# Altium PCB PCB1.PcbDoc
Units mil, origin at the board's own origin, x right, y up, seen from the top; angles counter-clockwise.
Board outline 3780 x 4078 mil, 2 copper layers (Top Layer, Bottom Layer); 63 components, 76 nets, 304 pads, 200 vias.
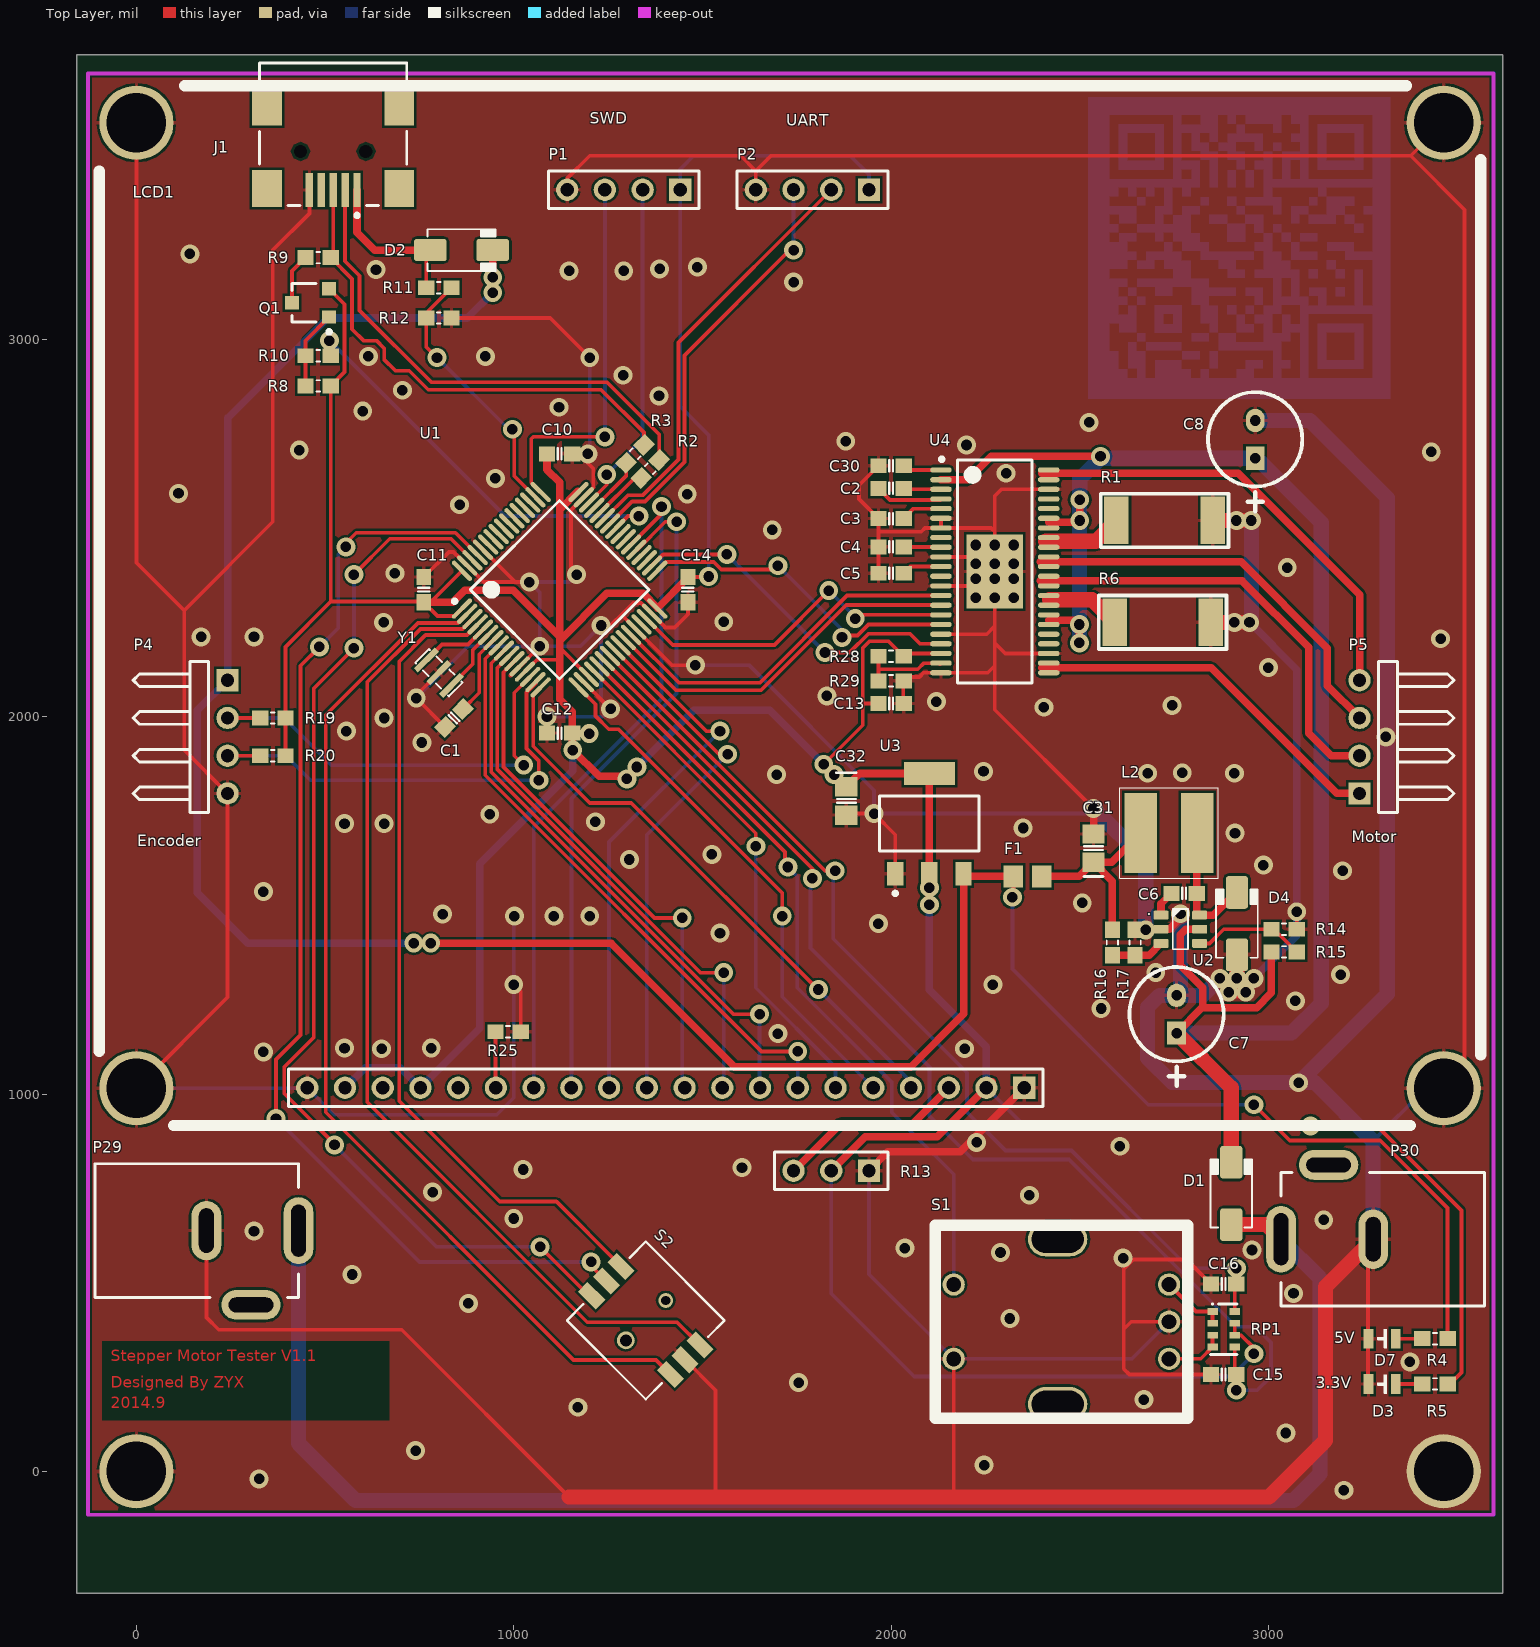
[diagram p0: Top Layer view]
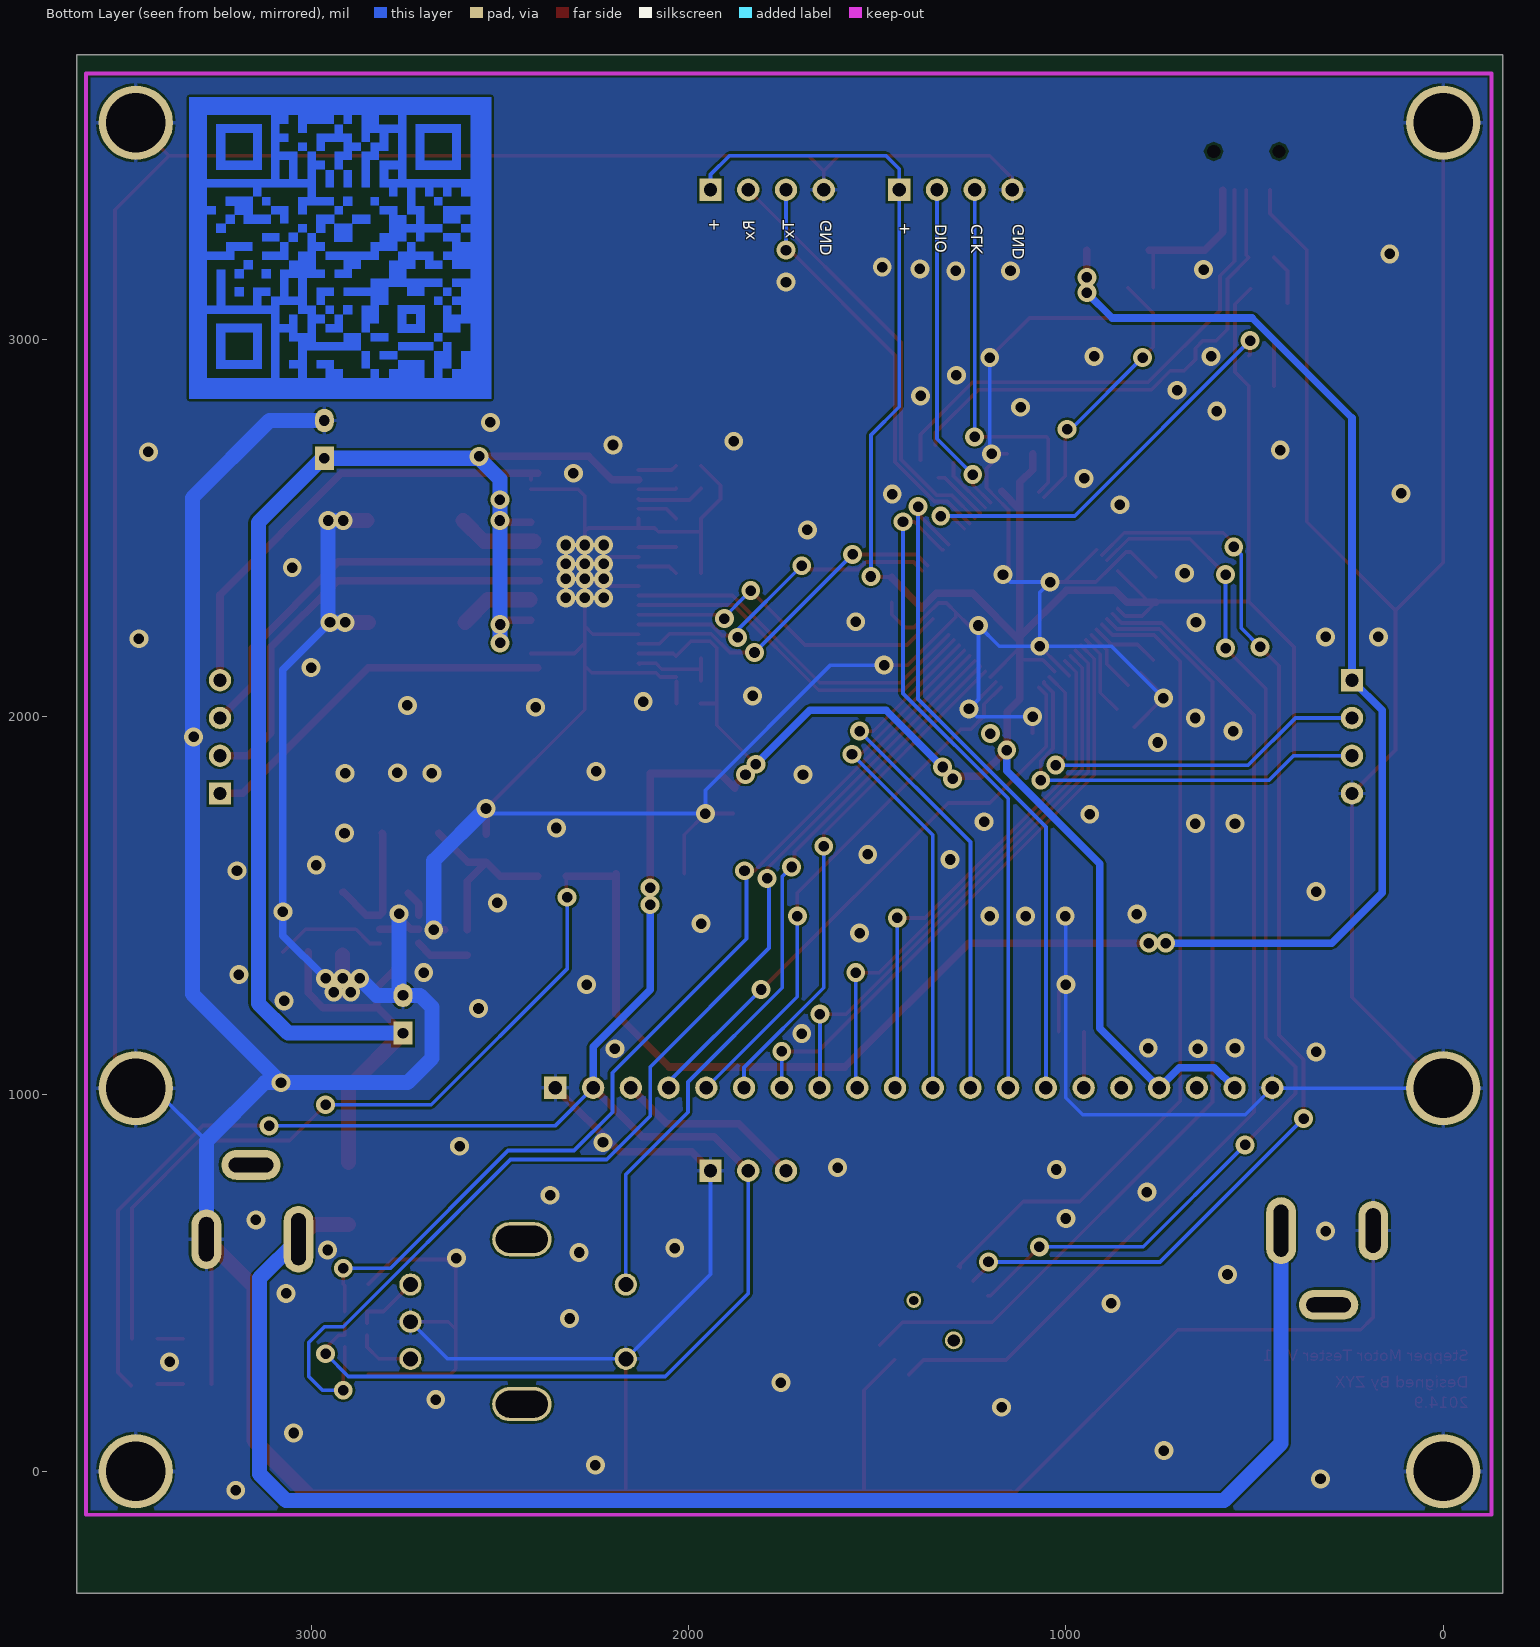
[diagram p1: Bottom Layer view, seen from below]
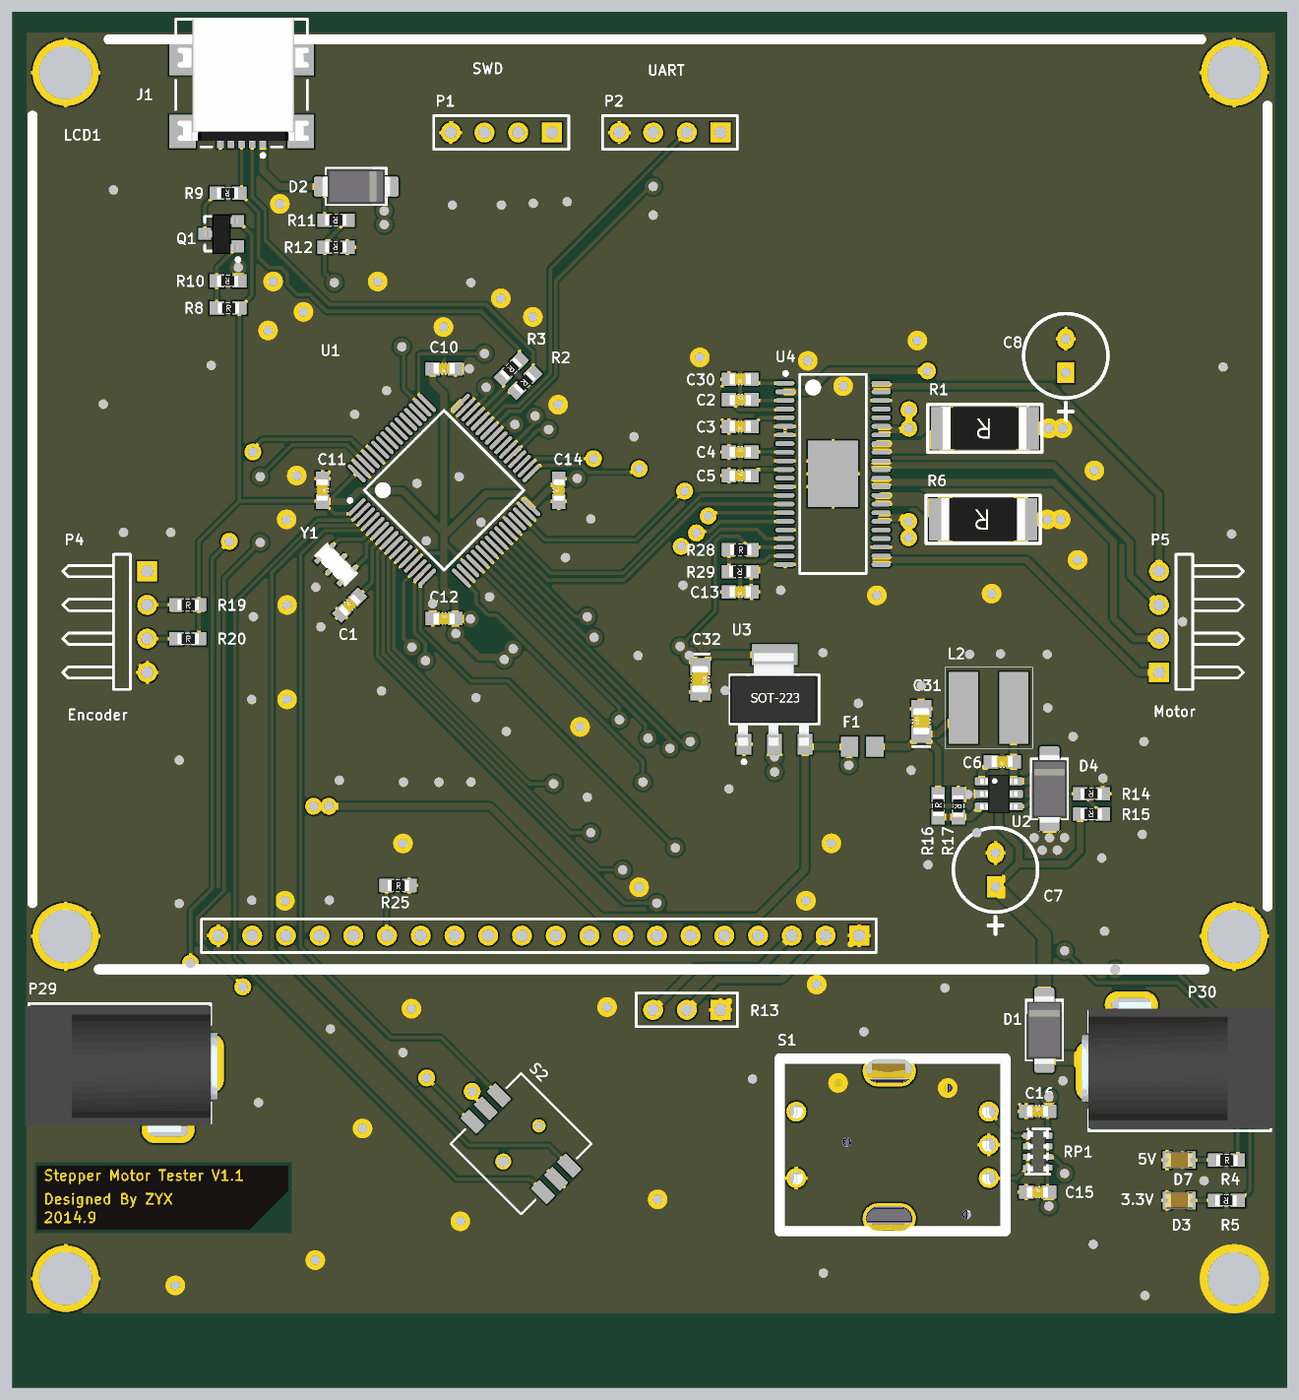
[diagram p2: 3D render of the assembled board from above, using the file's embedded part models]

## Layer stack, top to bottom
Top Layer: signal copper 1.4
Dielectric: dielectric 12.6, FR-4, Dk 4.8
Bottom Layer: signal copper 1.4

## Board outline
-158.43,-323.43 3621.57,-323.43 3621.57,3754.57 -158.43,3754.57

## Design rules (kind name [scope] priority, off if disabled: settings)
Clearance [All] p1: gap=6
ComponentClearance [All] p1 off: gap=0 collisioncheckmode=3 verticalgap=0 showdistances=FALSE
DiffPairsRouting [All] p1: maxlimit=10 minlimit=10 mostfreqgap=10 maxuncoupledlength=500
Height [All] p1 off: minheight=0 maxheight=5000 prefheight=500
HoleSize [All] p1: absolutevalues=TRUE maxlimit=157.48 minlimit=1 maxpercent=80.000 minpercent=20.000
MinimumSolderMaskSliver [All] p1: minsoldermaskwidth=0
PolygonConnect PolygonConnect_1 [IsVia vs IsPolygon] p1: connectstyle=Direct reliefconductorwidth=10 reliefentries=4 polygonreliefangle="90 Angle"
PolygonConnect [All] p2: connectstyle=Relief reliefconductorwidth=10 reliefentries=4 polygonreliefangle="90 Angle"
RoomDefinition Sheet1 [InComponentClass('Sheet1')] p1 off: confinementstyle=ConfineIn formatcopy=TRUE lockcomponents=FALSE outline 3666.57,-258.43 3936.57,-258.43 3936.57,181.57 3666.57,181.57
RoutingVias [All] p1: holewidth=14 width=24 viastyle="Through Hole" minholewidth=28 minwidth=50 maxholewidth=28 maxwidth=50
SilkToSilkClearance [All] p1: silktosilkclearance=0
SilkscreenOverComponentPads [IsPad] p1: minsilkscreentomaskgap=0
SolderMaskExpansion [All] p1: expansion=4
Width Width_VCC [InNet('V5') or InNet('VCC')] p1: maxlimit=30 minlimit=10 preferedwidth=20
Width Width_V24 [InNet('V24')] p2: maxlimit=40 minlimit=20 preferedwidth=30
Width Width_1 [All] p3: maxlimit=40 minlimit=10 preferedwidth=10
21 further rules are at their usual default settings.

## Classes and differential pairs
differential pair USB: +USB_P -USB_N

## Components (designator, comment, footprint, x,y, rotation, side; value= is the part's Value field where it differs from the comment)
C1 "Cap Semi" C-1608[0603] 841.57,1996.57 r45 top
C2 "Cap Semi" C-1608[0603] 2000,2605 r0 top
C3 "Cap Semi" C-1608[0603] 2000,2525 r180 top
C4 "Cap Semi" C-1608[0603] 2000,2450 r0 top
C5 "Cap Semi" C-1608[0603] 2000,2380 r0 top
C6 "Cap Semi" C-1608[0603] 2776.57,1531.57 r180 top
C7 "50V" RB.1/.25 2756.57,1211.57 r180 top
C8 "50V" RB.1/.25 2965,2735 r180 top
C10 "Cap Semi" C-1608[0603] 1121.57,2696.57 r180 top
C11 "Cap Semi" C-1608[0603] 761.57,2336.57 r270 top
C12 "Cap Semi" C-1608[0603] 1121.57,1956.57 r0 top
C13 "Cap Semi" C-1608[0603] 2000,2035 r180 top
C14 "Cap Semi" C-1608[0603] 1461.57,2336.57 r90 top
C15 "Cap Semi" C-1608[0603] 2881.57,256.57 r0 top
C16 "Cap Semi" C-1608[0603] 2881.57,496.57 r0 top
C30 "Cap Semi" C-1608[0603] 2000,2665 r180 top
C31 "6.3V" C-2012[0805] 2536.57,1651.57 r90 top
C32 "6.3V" C-2012[0805] 1881.57,1776.57 r270 top
D1 "1N5822" DO-214AC 2901.57,736.57 r90 top
D2 "1N5822" DO-214AC 861.57,3236.57 r0 top
D3 "3.3V" LED_0805_RED 3301.57,231.57 r180 top
D4 "1N5822" DO-214AC 2916.57,1451.57 r90 top
D7 "5V" LED_0805_RED 3301.57,351.57 r180 top
F1 "" 2012[0805] 2361.57,1576.57 r0 top
J1 "MINI-USB" "Mini USB 3D" 521.57,3704.57 r90 top
L2 "" L-5845 2736.57,1691.57 r180 top
LCD1 "YXY12864T" 12864T -98.43,916.57 r0 top
P1 "SWD" HDR1X4 1441.57,3396.57 r180 top
P2 "DBG_UART" HDR1X4 1941.57,3396.57 r180 top
P4 "Encoder" HDR1X4H 241.57,2096.57 r270 top
P5 "Motor" HDR1X4H 3241.57,1796.57 r90 top
P29 "Power OUT" DC_POWER 181.57,636.57 r0 top
P30 "Power IN" DC_POWER 3281.57,616.57 r180 top
Q1 "8550" SOT23B 461.57,3096.57 r90 top
R1 "Res Semi" R-6332[2512] 2725,2520 r180 top
R2 "Res Semi" R-1608[0603] 1361.57,2656.57 r225 top
R3 "Res Semi" R-1608[0603] 1321.57,2696.57 r225 top
R4 "Res Semi" R-1608[0603] 3441.57,351.57 r0 top
R5 "Res Semi" R-1608[0603] 3441.57,231.57 r180 top
R6 "Res Semi" R-6332[2512] 2720,2250 r180 top
R8 "Res Semi" R-1608[0603] 481.57,2876.57 r0 top
R9 "Res Semi" R-1608[0603] 481.57,3216.57 r180 top
R10 "Res Semi" R-1608[0603] 481.57,2956.57 r180 top
R11 "Res Semi" R-1608[0603] 801.57,3136.57 r180 top
R12 "Res Semi" R-1608[0603] 801.57,3056.57 r180 top
R13 "Adj" HDR1X3 1941.57,796.57 r180 top
R14 "Res Semi" R-1608[0603] 3041.57,1436.57 r180 top
R15 "Res Semi" R-1608[0603] 3041.57,1376.57 r180 top
R16 "Res Semi" R-1608[0603] 2586.57,1401.57 r90 top
R17 "Res Semi" R-1608[0603] 2646.57,1401.57 r270 top
R19 "Res Semi" R-1608[0603] 361.57,1996.57 r0 top
R20 "Res Semi" R-1608[0603] 361.57,1896.57 r0 top
R25 "Res Semi" R-1608[0603] 985,1165 r0 top
R28 "Res Semi" R-1608[0603] 2000,2160 r0 top
R29 "Res Semi" R-1608[0603] 2000,2095 r180 top
RP1 "10K" R0603x4 2881.57,376.57 r270 top
S1 "EC11" EC11 2441.57,396.57 r90 top
S2 "TS-006" TS-006 1350,400 r315 top
U1 "STM32F103RBT6" LQFP64_N 1121.57,2336.57 r45 top
U2 "MP2359" SOT23-6 2766.57,1436.57 r0 top
U3 "REG1117-3.3" SOT223-3D 2101.57,1716.57 r0 top
U4 "LV8731" LV8731_V3 2275,2385 r0 top
Y1 "8M" Crystal_C 801.57,2116.57 r315 top

## Footprints (in the part's own frame and the unit in brackets; to place one, negate y for a bottom-side part, rotate by r counter-clockwise, add the part's x,y. Pads: shape width x height; smd on the part's side, far side on the other; paste and mask are expansions set on the pad)
2012[0805] [mm] "Chip Resistor; Body 2.0 x 1.3 mm (LxW typ)"
  rect 1.3x1.5 smd: 1(-0.95,0) 2(0.95,0)
12864T [mm]
  round 5 hole 4: 0(2.5,2.5) 0(2.5,67.5) 0(90.5,2.5) 0(90.5,67.5)
  rect 1.5x1.5 hole 0.9: 1(62.26,2.54)
  round 1.5 hole 0.9: 2(59.72,2.54) 3(57.18,2.54) 4(54.64,2.54) 5(52.1,2.54) 6(49.56,2.54) 7(47.02,2.54) 8(44.48,2.54) 9(41.94,2.54) 10(39.4,2.54) 11(36.86,2.54) 12(34.32,2.54) 13(31.78,2.54) 14(29.24,2.54) 15(26.7,2.54) 16(24.16,2.54) 17(21.62,2.54) 18(19.08,2.54) 19(16.54,2.54) 20(14,2.54)
  silkscreen extent 0,0 93,70
C-1608[0603] [mm] "Chip Capacitor; Body 1.6 x 0.8 mm (LxW typ)"
  rect 1.1x1 smd: 1(-0.85,0) 2(0.85,0)
  silkscreen extent -0.13,-0.38 0.13,0.38, body extent -1.19,-1.21 1.19,1.17, height 0.29
C-2012[0805] [mm] "Chip Capacitor; Body 2.0 x 1.2 mm (LxW typ)"
  rect 1.3x1.5 smd: 1(-0.95,0) 2(0.95,0)
  silkscreen extent -1.9,-0.65 0.13,0.65, body extent -1,-0.64 1,0.62, height 0.78
Crystal_C [mm] "含电容晶振，村田 3."
  rect 0.4x2 smd: 1(-1.2,0) 2(0,0) 3(1.2,0)
  silkscreen extent -1.6,-0.65 1.6,0.65, body extent -2.25,-2.23 2.25,2.26, height 0.7
DC_POWER [mm]
  oval 2x4.5 hole 1 slot 3.5 at 90 deg: 1(6.3,0.036)
  oval 2x4 hole 1 slot 3 at 90 deg: 2(0.1,0.036)
  oval 4x2 hole 1 slot 3 at 0 deg: 3(3.1,-4.964)
  silkscreen extent -7.4,-4.46 6.3,4.54, body extent -7.66,-5.17 6.84,4.33, height 11
DO-214AC [mm] "JEDEC DO214 variation AC. SMA"
  round 0.508 on Mech15: 0(0,0)
  rrect25% 2.2x1.5 smd: 1(-2.1,0) 2(2.1,0)
  silkscreen extent -2.3,-1.4 2.3,1.4, body extent -2.6,-1.3 2.6,1.3, height 2.42
EC11 [mm]
  oval 2.3x4 hole 1.8 slot 3.5 at 90 deg: 0(-5.55,0) 0(5.55,0)
  round 1.5 hole 1: A(-2.5,-7.5) B(2.5,-7.5) C(0,-7.5) D(-2.5,7) E(2.5,7)
  silkscreen extent -6.5,-8.75 6.5,8.25, body extent -6.59,-7.65 6.51,7.3, height 24.82
HDR1X3 [mm] "Connector; Header; 3 Position"
  rect 1.5x1.5 hole 0.9: 1(0,0)
  round 1.5 hole 0.9: 2(2.54,0) 3(5.08,0)
  silkscreen extent -1.27,-1.27 6.35,1.27
HDR1X4 [mm] "Connector; Header; 4 Position"
  rect 1.5x1.5 hole 0.9: 1(0,0)
  round 1.5 hole 0.9: 2(2.54,0) 3(5.08,0) 4(7.62,0)
  silkscreen extent -1.27,-1.27 8.89,1.27
HDR1X4H [mm] "Connector; Header; 4 Position; Right Angle"
  rect 1.5x1.5 hole 0.9: 1(0,0)
  round 1.5 hole 0.9: 2(2.54,0) 3(5.08,0) 4(7.62,0)
  silkscreen extent -1.27,-6.35 8.89,-1.27
L-5845 [mm]
  rect 2.2x5.4 smd: 1(-1.9,0) 2(1.9,0)
  silkscreen extent -3.3,-3.05 3.3,3.05
LED_0805_RED [mil]
  rect 26x52 smd: 1(-36,0) 2(36,0)
  silkscreen extent -12,-24 12,24, body extent -40,-25 40,25, height 43
LQFP64_N [mm] "Thin QFP, 64-Leads, Body 10x10mm, Pitch 0.5mm, IPC Medium Density"
  oval 1.8x0.3 smd: 1(-5.55,3.75) 2(-5.55,3.25) 3(-5.55,2.75) 4(-5.55,2.25) 5(-5.55,1.75) 6(-5.55,1.25) 7(-5.55,0.75) 8(-5.55,0.25) 9(-5.55,-0.25) 10(-5.55,-0.75) 11(-5.55,-1.25) 12(-5.55,-1.75) 13(-5.55,-2.25) 14(-5.55,-2.75) 15(-5.55,-3.25) 16(-5.55,-3.75) 33(5.55,-3.75) 34(5.55,-3.25) 35(5.55,-2.75) 36(5.55,-2.25) 37(5.55,-1.75) 38(5.55,-1.25) 39(5.55,-0.75) 40(5.55,-0.25) 41(5.55,0.25) 42(5.55,0.75) 43(5.55,1.25) 44(5.55,1.75) 45(5.55,2.25) 46(5.55,2.75) 47(5.55,3.25) 48(5.55,3.75)
  oval 0.3x1.8 smd: 17(-3.75,-5.55) 18(-3.25,-5.55) 19(-2.75,-5.55) 20(-2.25,-5.55) 21(-1.75,-5.55) 22(-1.25,-5.55) 23(-0.75,-5.55) 24(-0.25,-5.55) 25(0.25,-5.55) 26(0.75,-5.55) 27(1.25,-5.55) 28(1.75,-5.55) 29(2.25,-5.55) 30(2.75,-5.55) 31(3.25,-5.55) 32(3.75,-5.55) 49(3.75,5.55) 50(3.25,5.55) 51(2.75,5.55) 52(2.25,5.55) 53(1.75,5.55) 54(1.25,5.55) 55(0.75,5.55) 56(0.25,5.55) 57(-0.25,5.55) 58(-0.75,5.55) 59(-1.25,5.55) 60(-1.75,5.55) 61(-2.25,5.55) 62(-2.75,5.55) 63(-3.25,5.55) 64(-3.75,5.55)
  silkscreen extent -5.67,-4.25 4.25,4.57, body extent -5,-5 5,5, height 1.6
LV8731_V3 [mm] "SOP, 44-Leads, Body 15.0x5.6mm (max), Pitch 0.65mm, IPC Medium Density"
  oval 1.45x0.35 smd: 1(-3.625,6.825) 2(-3.625,6.175) 3(-3.625,5.525) 4(-3.625,4.875) 5(-3.625,4.225) 6(-3.625,3.575) 7(-3.625,2.925) 8(-3.625,2.275) 9(-3.625,1.625) 10(-3.625,0.975) 11(-3.625,0.325) 12(-3.625,-0.325) 13(-3.625,-0.975) 14(-3.625,-1.625) 15(-3.625,-2.275) 16(-3.625,-2.925) 17(-3.625,-3.575) 18(-3.625,-4.225) 19(-3.625,-4.875) 20(-3.625,-5.525) 21(-3.625,-6.175) 22(-3.625,-6.825) 23(3.625,-6.825) 24(3.625,-6.175) 25(3.625,-5.525) 26(3.625,-4.875) 27(3.625,-4.225) 28(3.625,-3.575) 29(3.625,-2.925) 30(3.625,-2.275) 31(3.625,-1.625) 32(3.625,-0.975) 33(3.625,-0.325) 34(3.625,0.325) 35(3.625,0.975) 36(3.625,1.625) 37(3.625,2.275) 38(3.625,2.925) 39(3.625,3.575) 40(3.625,4.225) 41(3.625,4.875) 42(3.625,5.525) 43(3.625,6.175) 44(3.625,6.825)
  rect 3.8x5 smd: 45(0,0)
  silkscreen extent -3.7,-7.5 2.5,7.67, body extent -2.8,-7.5 2.8,7.5, height 1.7
"Mini USB 3D" [mm] "Connector; USB2.0, Type B, SM; 5 Position; Right Angle"
  rect 2.3x0.5 smd: 1(-7.85,-1.6) 2(-7.85,-0.8) 3(-7.85,0) 4(-7.85,0.8) 5(-7.85,1.6)
  rect 2.5x2 smd: 6(-7.75,4.45) 7(-2.25,4.45) 8(-7.75,-4.45) 9(-2.25,-4.45)
  round 0.6 hole 0.9 unplated: MH1(-5.25,2.2) MH2(-5.25,-2.2)
  silkscreen extent -9.67,-4.95 0.7,4.95, body extent -8.49,-5.08 0.76,4.82, height 3.93
R0603x4 [mm] "Chip Resistor Array, (0603x4); SM; 8 Leads; Body 3.40 x 1.80 mm (LxW max)"
  rect 0.45x0.7 smd: 1(-1.2,-0.75) 2(-0.4,-0.75) 3(0.4,-0.75) 4(1.2,-0.75) 5(1.2,0.75) 6(0.4,0.75) 7(-0.4,0.75) 8(-1.2,0.75)
  silkscreen extent -1.75,-0.9 1.7,0.9, body extent -1.6,-0.76 1.6,0.84, height 0.65
R-1608[0603] [mm] "Chip Resistor; Body 1.6 x 0.8 mm (LxW typ)"
  rect 1.1x1 smd: 1(-0.85,0) 2(0.85,0)
  silkscreen extent -0.13,-0.38 0.13,0.38, body extent -1.77,-1.81 1.83,1.79, height 0.48
R-6332[2512] [mm] "贴片电阻2512 size6.35*3.2mm"
  rect 1.65x3.2 smd: 1(-3.24,0) 2(3.24,0)
  silkscreen extent -4.3,-1.8 4.3,1.8, body extent -3.4,-1.65 3.4,1.65, height 0.6
RB.1/.25 [mil]
  rect 50x62 hole 28: 1(0,50)
  oval 50x62 hole 28: 2(0,-50)
  silkscreen extent -125,-125 125,190
SOT23-6 [mm]
  round 0.5 on Mech15: 0(0,0)
  rrect25% 1x0.6 smd: 1(-1.3,0.95) 2(-1.3,0) 3(-1.3,-0.95) 4(1.3,-0.95) 5(1.3,0) 6(1.3,0.95)
  silkscreen extent -0.51,-1.35 0.51,1.35, body extent -1.4,-1.45 1.4,1.45, height 1.44
SOT23B [mm] "SOT-23; 3 Leads; Body 3.0 x 2.6 mm, inc. leads (LxW max)"
  rect 0.9x0.95 smd: 1(-0.95,-1.25) 2(0.95,-1.25) 3(0,1.25)
  silkscreen extent -2.07,-1.38 1.3,1.25, body extent -1.52,-1.27 1.48,1.27, height 1.1
SOT223-3D [mm] "SOT-223/SC-73; 4 Leads; Body 6.7 x 7.3 mm, inc. leads (LxW max)"
  rect 1.1x1.55 smd: 1(-2.3,-3.375) 2(0,-3.375) 3(2.3,-3.375)
  rect 3.45x1.55 smd: 4(0,3.375)
  silkscreen extent -3.35,-4.82 3.35,1.85, body extent -3.33,-3.48 3.17,3.48, height 1.66
TS-006 [mm]
  round 1 hole 0.62: 0(0,1.9)
  round 1.2 hole 0.82: 0(0,-1.9)
  rect 1.7x0.9 smd: 1(3.75,-1.4) 2(3.75,0) 3(3.75,1.4) 4(-3.75,1.4) 5(-3.75,0) 6(-3.75,-1.4)
  silkscreen extent -3.75,-3.75 3.75,3.75

## Part data
C1 C2 C3 C4 C5 C6 C10 C11 C12 C13 C14 C15 C16 C30: "Capacitor (Semiconductor SIM Model)"
C7 C8: library part "Cap Pol1", "Polarized Capacitor (Radial)"
C31 C32: library part "Cap Pol3", "Tantalum capacitor"
D1 D2 D4: library part "D Schottky", "Schottky Diode"
D3 D7: library part LED2, "Typical RED, GREEN, YELLOW, AMBER GaAs LED"
F1: library part "Fuse 1", "Fuse"
J1: library part 440478-1, "USB 2.0, Right Angle, SMT, A Type, Receptacle, 5 Position, Black"
L2: library part Inductor, "Inductor"
P1 P2: library part "Header 4", "Header, 4-Pin"
P4 P5: library part "Header 4H", "Header, 4-Pin, Right Angle"
P29 P30: library part MHDR1X2, "Header, 2-Pin"
Q1: library part PNP, "PNP Bipolar Transistor"
R1 R2 R3 R4 R5 R6 R8 R9 R10 R11 R12 R14 R15 R16 R17 R19 R20 R25 R28 R29: "Semiconductor Resistor"
R13: library part "Res Tap", "Tapped Resistor"
RP1: library part RPACK4
U1: "STM32 ARM-based 32-bit MCU High-density"
U2: "1.2A, 24V, 1.4MHz  Step-Down Converter"
U3: "800mA and 1A Low Dropout Positive Regulator 2.85V, 3.3V, 5V, and Adjustable"
Y1: library part XTAL_C, "Crystal Oscillator"

## Free pads (board coordinates)
  round 196.85 hole 157.48: 0(0,0) 1(3464.57,0)

## Via types
v1: diameter 50, hole 28, Top Layer to Bottom Layer, tented both sides, 140 vias
v2: diameter 50, hole 28, Top Layer to Bottom Layer, 60 vias

## Nets (pads, with @x,y where several pads share a name; then routed paths per layer and width w, separated by ;. In a path a pad name is that pad's centre, name@x,y a point inside that pad or via, vN(x,y) a via of type N, cw(c..) or ccw(c..) an arc to the next point about the centre after c; other vN are vias at no path point)
EMO: U4.8
GND: C1.1 C3.2 C4.1 C5.1 C7.2 C8.2 C10.1 C11.1 C12.1 C13.1 C14.1 C15.1 C16.1 C30.2 C31.2 C32.2 D3.2 D4.1 D7.2 J1.5 LCD1.0 LCD1.1 LCD1.20 P1.4 P2.4 P4.4 P29.2 P30.2 pad.0 pad.1 R1.1 R6.1 R12.1 R13.1 R14.1 R17.1 R25.2 R29.1 S1.C S1.D S2.2 U1.12 U1.18 U1.28 U1.31 U1.47 U1.60 U1.63 U2.2 U3.1 U4.6 U4.7 U4.10 U4.13 U4.18 U4.22 U4.25 U4.42 U4.45 Y1.2 | length 32671.4
  Top Layer w10: LCD1.0@0,1015 241.57,1256.57 P4.4 126.57,1911.57 126.57,2281.57 ; LCD1.0@0,3574.06 0,2408.15 126.57,2281.57 ; P29.2 185.53,407.62 218.15,375 703.15,375 1146.57,-68.43 ; J1.5 458.58,3333.58 361.57,3236.57 361.57,2516.57 126.57,2281.57 ; C11.1 828.11,2436.57 840.62,2436.57 U1.63 920.62,2356.57 1004.14,2356.57 ; Y1.2 741.57,2056.57 v1(741.57,2049.25) C1.1 ; R12.1 1096.57,3056.57 v1(1201.57,2951.57) ; U1.60 1004.14,2356.57 ; U1.12@991.57,2109.14 U1.12 v1(1069.01,2186.57) ; v2(1000,1290) 1018.46,1271.54 R25.2 ; v1(1041.57,2356.57) 1004.14,2356.57 ; C12.1 v1(1088.11,2000.04) ; P1.4 1141.57,3426.57 1201.57,3486.57 1601.57,3486.57 1641.57,3446.57 ; C10.1 1171.49,2696.57 1210.57,2657.49 1210.57,2606.53 U1.47 1151.57,2547.53 1151.57,2391.57 v1(1166.57,2376.57) ; U1.18 v1(1256.57,2020.62) ; 1256.57,2241.57 1291.57,2276.57 ; S2.2 1535,215 1535,-68.43 ; C14.1 1461.57,2271.57 1426.57,2236.57 1402.53,2236.57 U1.31 1337.53,2301.57 1316.57,2301.57 1291.57,2276.57 ; v1(1481.57,2136.57) 1419.01,2136.57 U1.28 1291.57,2264.01 1291.57,2276.57 ; P2.4 1641.57,3446.57 ; C32.2@1881.57,1743.11 v1(1955.04,1743.11) 2011.02,1687.13 U3.1 ; C5.1 C3.2 1915,2576.54 1915,2613.46 C30.2 ; 1966.54,2490 2080,2490 2090.16,2500.16 U4.7 ; C13.1@2032,2035 R29.1@2032,2093.54 ; R29.1@2033.46,2105 2075,2105 2086.3,2116.3 U4.22 2256.3,2116.3 2275,2135 ; U4.18 2253.66,2218.66 2275,2240 ; U4.13 2236.61,2346.61 U4.45 ; U4.10 2236.61,2423.39 U4.45 ; U4.6 U4.7 ; 2165.98,-67.83 S1.D ; 2275,2195 2302.52,2167.48 U4.25 ; U4.42 2292.52,2602.52 2275,2585 2275,2490 ; v1(2536.57,1756.57) 2275,2018.15 2275,2135 ; S1.C 2636.57,396.57 2616.57,376.57 ; C15.1 2631.57,256.57 2616.57,271.57 2616.57,376.57 ; C16.1 2783.11,561.57 2641.57,561.57 2616.57,536.57 2616.57,376.57 ; v1(2871.57,1306.57) v1(2916.57,1306.57) v1(2961.57,1306.57) ; R14.1 v1(3075.04,1483.11) ; D3.2@3264.17,231.57 P30.2@3264.17,601.7 ; LCD1.0@3464.57,3574.06 3377.09,3486.57 ; LCD1.0@3520,1070.43 3520,3343.66 3377.09,3486.57 ; 1641.57,3446.57 1681.57,3486.57 3377.09,3486.57 ; U4.7 2264.84,2500.16 2275,2490 ; 2275,2135 2275,2240 ; 2275,2240 U4.45 ; U4.45 2275,2490
  Top Layer w20: R13.1 1991.57,846.57 2182.76,846.57 LCD1.1 LCD1.1@2335.04,1034.29 ; C31.2 v1(2536.57,1756.57) ; R17.1 v1(2675.04,1435.04) v1@2676.57,1436.57 ; U2.2 2736.57,1436.57 2767.07,1467.07 v1(2767.07,1477.57)
  Top Layer w40: 1146.57,-68.43 3001.57,-68.43 3151.57,81.57 3151.57,489.1 P30.2@3264.17,601.7 ; R6.1 v2(2910,2250) v2(2950,2250) ; R1.1 v2(2915,2520) v2(2955,2520) ; D4.1 v1(2916.57,1306.57) 2916.57,1272.57 2919,1275 2935,1275 v1(2940,1270)
  Bottom Layer w10: LCD1.0@0,1015 LCD1.20@451.18,1015 ; LCD1.20 524.33,945 955,945 1000,990 v2(1000,1290) v1@1000,1470 ; v1(741.57,2049.25) 878.9,2186.57 v1(1069.01,2186.57) ; v1(1088.11,2000.04) 1235.99,2000.04 v1(1256.57,2020.62) 1231.57,2045.62 v1(1231.57,2241.57) 1176.57,2186.57 v1(1069.01,2186.57) ; v1(1166.57,2376.57) 1146.57,2356.57 v1(1041.57,2356.57) 1069.01,2329.14 v1(1069.01,2186.57) ; v1(1196.57,2696.57) 1201.57,2701.57 v1(1201.57,2951.57) ; v1(1481.57,2136.57) 1623.43,2136.57 1955.04,1804.96 v1(1955.04,1743.11) 2523.11,1743.11 v1(2536.57,1756.57) ; R13.1 1941.57,522.56 S1.D 2638.43,298.15 S1.C ; 3277.62,875.53 LCD1.0@3417.09,1015
  Bottom Layer w20: C7.2 C7.2@2767.07,1272.07 ; v2(2950,2250) 3075.04,2124.96 v1(3075.04,1483.11) 3075.04,1420.04 v1(2961.57,1306.57)
  Bottom Layer w40: v1(2536.57,1756.57) 2675.04,1618.11 v1(2675.04,1435.04) ; C7.2@2767.07,1272.07 v1(2767.07,1477.57) ; v1(2871.57,1306.57) 2826.57,1261.57 C7.2 2711.57,1261.57 2680,1230 2680,1095 2745,1030 3123.15,1030 3277.62,875.53 P30.2 ; v2(2910,2250) v2(2950,2250) 2955,2255 v2(2955,2520) v2(2915,2520) ; C8.2 3110,2785 3315,2580 3315,1265 v1(3080,1030)
  other v1: 3200,-50 2246.57,16.57 3046.57,101.57 2670,190 3375,290 2315,405 3066.57,471.57 571.57,521.57 2956.57,586.57 2036.57,591.57 311.57,636.57 3146.57,666.57 1000,670 2366.57,731.57 785,740 2606.57,861.57 336.57,1111.57 551.57,1121.57 781.57,1121.57 2556.57,1226.57 3071.57,1246.57 2895,1270 3191.57,1316.57 2701.57,1321.57 1546.57,1426.57 1966.57,1451.57 1001.57,1471.57 1106.57,1471.57 1201.57,1471.57 811.57,1476.57 2506.57,1506.57 336.57,1536.57 3196.57,1591.57 2986.57,1606.57 1306.57,1621.57 2911.57,1691.57 2350,1705 551.57,1716.57 1216.57,1721.57 936.57,1741.57 1696.57,1846.57 2680,1850 2910,1850 2771.57,1851.57 2245,1855 756.57,1931.57 3311.57,1946.57 556.57,1961.57 2120,2040 1830,2055 3456.57,2206.57 171.57,2211.57 311.57,2211.57 1556.57,2251.57 2225,2315 2275,2315 2325,2315 2225,2365 2275,2365 2325,2365 2225,2405 2275,2405 2325,2405 2225,2455 2275,2455 2325,2455 1685,2495 856.57,2561.57 111.57,2591.57 951.57,2631.57 3431.57,2701.57 431.57,2706.57 1741.57,3151.57 1146.57,3181.57 1291.57,3181.57 1386.57,3186.57 1486.57,3191.57 141.57,3226.57
  other v2: 325,-20 740,55 1170,170 1755,235 880,445 2615,565 2290,580 1025,800 1605,805 2226.57,871.57 650,1120 2195,1120 1700,1160 2270,1290 1525,1635 656.57,1716.57 656.57,1996.57 2405,2025 2745,2030 3000,2130 655,2250 685,2380 3050,2395 1460,2590 2305,2645 2200,2720 1880,2730 2525,2780 600,2810 1120,2820 1385,2850 705,2865 1290,2905 615,2955 925,2955 635,3185
KEY_C: S2.5 U1.61 | length 3053.9
  Top Layer w10: v2(370,935) 370,1091.51 435,1156.51 435,2135 v2(485,2185) ; v2(555,2450) 555,2460 582.57,2487.57 845.3,2487.57 U1.61 ; v2@1200,550 v2(1205,555) 1205,545 S2.5
  Bottom Layer w10: v2(370,935) 750,555 v2(1205,555) ; v2(485,2185) 535,2235 535,2430 v2(555,2450)
KEY_D: S2.1 U1.2 | length 2740.5
  Top Layer w10: U1.2 852.62,2248.57 745.95,2248.57 501.57,2004.2 501.57,951.57 1158.15,295 1377.05,295 S2.1
KEY_L: S2.6 U1.62 | length 2866.6
  Top Layer w10: v2@526.57,866.57 391.57,1001.57 391.57,1071.57 470,1150 470,2075 v1(576.57,2181.57) ; v1(576.57,2376.57) 671.57,2471.57 833.46,2471.57 U1.62 ; v2(1070,595) 1199.58,465.42 S2.6
  Bottom Layer w10: v2(525,865) 795,595 v2(1070,595) ; v1(576.57,2181.57) v1(576.57,2376.57)
KEY_R: S2.3 U1.3 | length 2609.8
  Top Layer w10: U1.3 864.46,2232.57 752.57,2232.57 611.57,2091.57 611.57,978.43 1195,395 1432.95,395 S2.3
KEY_U: S2.4 U1.4 | length 2193
  Top Layer w10: U1.4 876.3,2216.57 766.57,2216.57 696.57,2146.57 696.57,981.57 963.15,715 1112.95,715 S2.4 ; S2.4@1280,540 S2.4@1280,550
LCD_D0: LCD1.7 U1.8 | length 1589
  Top Layer w10: U1.8 924.57,2153.49 924.57,1844.76 1656.57,1112.76 1742.76,1112.76 v1@1751.57,1121.57
  Bottom Layer w10: LCD1.7 v1(1752.76,1112.76)
LCD_D1: LCD1.8 U1.9 | length 1506.1
  Top Layer w10: U1.9 940.57,2141.66 940.57,1853.57 1582.57,1211.57 v1(1651.57,1211.57)
  Bottom Layer w10: LCD1.8@1651.57,1017.76 v1(1651.57,1211.57)
LCD_D2: LCD1.9 U1.10 | length 1438.3
  Top Layer w10: U1.10 956.57,2129.82 956.57,1860.2 1495.2,1321.57 v1(1556.57,1321.57)
  Bottom Layer w10: LCD1.9@1556.57,1020.39 v1(1556.57,1321.57)
LCD_D3: LCD1.10 U1.11 | length 1376.2
  Top Layer w10: U1.11 972.57,2117.98 972.57,1866.83 1372.83,1466.57 v1(1446.57,1466.57)
  Bottom Layer w10: LCD1.10@1446.57,1022.76 v1(1446.57,1466.57)
LCD_D4: LCD1.11 U1.24 | length 1384
  Top Layer w10: U1.24 1543.66,1900.57 v1(1566.73,1900.57)
  Bottom Layer w10: LCD1.11 1352.76,1686.6 v1(1566.73,1900.57)
LCD_D5: LCD1.12 U1.25 | length 1424.5
  Top Layer w10: U1.25 1510.49,1961.57 v1(1546.57,1961.57)
  Bottom Layer w10: LCD1.12 1252.76,1667.76 v1(1546.57,1961.57)
LCD_D6: LCD1.13 U1.37 | length 1753.3
  Top Layer w10: U1.37 1328.27,2442.36 1401.57,2516.57 v1(1431.57,2516.57)
  Bottom Layer w10: LCD1.13 1152.76,1782.76 1431.57,2061.57 v1(1431.57,2516.57)
LCD_D7: LCD1.14 U1.38 | length 1814.1
  Top Layer w10: U1.38 1391.57,2536.98 v1(1391.57,2556.57)
  Bottom Layer w10: LCD1.14 1052.76,1707.76 1391.57,2046.57 v1(1391.57,2556.57)
LCD_EN: LCD1.6 U1.20 | length 1367.7
  Top Layer w10: U1.20 1641.57,1691.3 v1(1641.57,1656.57)
  Bottom Layer w10: v1(1641.57,1656.57) 1641.57,1281.57 1852.76,1070.39 LCD1.6
LCD_RS: LCD1.4 U1.16 | length 1549.2
  Top Layer w10: U1.16 1051.57,2057.78 1051.57,1921.57 1201.57,1771.57 1311.57,1771.57 1806.18,1276.97 v1(1807.36,1276.97)
  Bottom Layer w10: v1(1807.36,1276.97) 2052.76,1031.57 LCD1.4
LCD_RW: LCD1.5 U1.17 | length 1399.8
  Top Layer w10: U1.17 1216.57,2032.78 1216.57,2001.57 1251.57,1966.57 1277.49,1966.57 1711.57,1532.49 v1(1711.57,1471.57)
  Bottom Layer w10: v1(1711.57,1471.57) 1711.57,1257.76 LCD1.5
M_DIR: U1.26 U4.15 | length 984.2
  Top Layer w10: U1.26 1429.91,2070 1655,2070 1881,2296 2131.72,2296 U4.15
M_EN: U1.34 U4.19 | length 917.5
  Top Layer w10: U1.34 1395.95,2430 v2(1565,2430) ; v2(1825,2170) 1890,2170 1940,2220 2050,2220 2076.93,2193.07 U4.19
  Bottom Layer w10: v2(1565,2430) v2(1825,2170)
M_MS1: U1.33 U4.17 | length 896.8
  Top Layer w10: U1.33 1403.79,2410 1530,2410 1550,2390 1690,2390 v2(1700,2400) ; v2(1870,2210) 1880,2210 1885,2215 1910.91,2215 1940.16,2244.25 U4.17
  Bottom Layer w10: v2(1700,2400) 1885,2215 1880,2210 v2(1870,2210)
M_MS2: U1.30 U4.16 | length 983.9
  Top Layer w10: U1.30 1421.26,2190 1691,2190 v2(1835,2334) ; v2(1905,2260) 1905,2270 1920,2270 1939.84,2269.84 U4.16
  Bottom Layer w10: v2(1835,2334) 1920,2249 v2@1920,2270 ; v2(1905,2260) 1905,2270 v2@1925,2255
M_MS3: U1.29
M_STEP: U1.27 U4.14 | length 969.6
  Top Layer w10: U1.27 1437.75,2090 1652.37,2090 1883.4,2321.02 U4.14
MONI: U4.12
NetC2_1: C2.1 U4.4 | length 179.5
  Top Layer w10: C2.1 1997.22,2574.31 2129.67,2574.31 U4.4
NetC2_2: C2.2 U4.3 | length 99.8
  Top Layer w10: C2.2 2035.94,2602.52 U4.3
NetC3_1: C3.1 U4.5 | length 109.7
  Top Layer w10: C3.1 2059.8,2551.34 U4.5
NetC4_2: C4.2 U4.9 | length 99.2
  Top Layer w10: C4.2 2131.26,2450 U4.9
NetC5_2: C5.2 U4.11 | length 106.2
  Top Layer w10: C5.2 2051.26,2397.8 U4.11
NetC6_1: C6.1 D4.2 L2.1 U2.6 | length 345.1
  Top Layer w20: L2.1 2810.04,1690.24 C6.1 2810.04,1481.69 U2.6 2853.98,1473.98 2914.25,1534.25 D4.2
NetC6_2: C6.2 U2.1 | length 69.1
  Top Layer w20: U2.1 2715.39,1503.86 C6.2
NetC30_1: C30.1 U4.1 | length 103.5
  Top Layer w10: C30.1 2044.76,2653.7 U4.1
NetC31_1: C31.1 F1.2 L2.2 R16.2 | length 510.3
  Top Layer w20: F1.2 2498.98,1576.57 C31.1 ; R16.2 2586.57,1564.17 C31.1 ; L2.2 2584.37,1614.17 C31.1
NetD1_1: D1.1 P29.1 P30.1 | length 4176.2
  Top Layer w40: D1.1 2994.78,653.9 P30.1
  Bottom Layer w40: P29.1 429.62,73.53 580.57,-77.43 3066.57,-77.43 3136.57,-7.43 3136.57,512.1 P30.1
NetD3_1: D3.1 R5.2 | length 69.1
  Top Layer w10: D3.1@3338.98,231.57 R5.2
NetD7_1: D7.1 R4.1 | length 69.1
  Top Layer w10: D7.1@3338.98,351.57 R4.1
NetLCD1_3: LCD1.3 R13.3 | length 502.3
  Top Layer w20: R13.3 1866.57,921.57 2057.76,921.57 LCD1.3
NetLCD1_15: LCD1.15 R25.1 | length 148.9
  Top Layer w10: R25.1 951.54,1017.8 LCD1.15
NetP5_1: P5.1 U4.23 U4.24 | length 979.7
  Top Layer w20: 2400,2130 2848.15,2130 3181.57,1796.57 P5.1
NetP5_2: P5.2 U4.32 U4.33 | length 1171.4
  Top Layer w20: 2395,2360 2930,2360 3106.57,2183.43 3106.57,1956.57 3166.57,1896.57 P5.2
NetP5_3: P5.3 U4.34 U4.35 | length 1076.4
  Top Layer w20: 2395,2410 2928.15,2410 3156.57,2181.57 3156.57,2081.57 P5.3
NetP5_4: P5.4 U4.43 U4.44 | length 1216.2
  Top Layer w10: U4.43 2417.72,2642.72
  Top Layer w20: 2400,2645 2920,2645 3241.57,2323.43 P5.4
NetQ1_1: Q1.3 R9.2 | length 134.8
  Top Layer w10: Q1.3 412.36,3180.83 R9.2
NetQ1_2: Q1.1 R8.1 R10.2 | length 208.6
  Top Layer w10: R8.1 R10.2 448.11,2996.5 Q1.1
NetR1_2: R1.2 U4.36 U4.37 | length 210.2
  Top Layer w40: 2410,2465 2542.44,2465 R1.2
NetR2_2: R2.2 U1.44 | length 149.1
  Top Layer w10: U1.44 1320.48,2632.91 R2.2
NetR3_2: R3.2 U1.45 | length 154.2
  Top Layer w10: U1.45 1297.91,2638.19 R3.2
NetR6_2: R6.2 U4.30 U4.31 | length 197.3
  Top Layer w40: 2420,2310 2532.44,2310 R6.2
NetR10_1: R10.1 U1.41 | length 1130.4
  Top Layer w10: v1(511.57,2996.57) 511.57,2960.04 R10.1 ; U1.41 1302.66,2531.57 v1(1331.57,2531.57)
  Bottom Layer w10: v1(511.57,2996.57) 976.57,2531.57 v1(1331.57,2531.57)
NetR11_1: R11.1 R12.2 U1.50 | length 701.4
  Top Layer w10: v1(796.57,2951.57) 768.11,2980.04 R12.2 768.11,3069.65 R11.1 ; v1@1001.57,2756.57 1001.57,2637.53 U1.50
  Bottom Layer w10: v1(796.57,2951.57) 986.57,2761.57 v1(996.57,2761.57)
NetR14_2: R14.2 R15.1 U2.4 | length 297.6
  Top Layer w10: U2.4 2844.17,1399.17 2881.57,1436.57 R14.2 3015.04,1436.57 R15.1
NetR16_1: R16.1 R17.2 U2.3 | length 141.7
  Top Layer w20: R16.1 R17.2 2684.33,1368.11 U2.3
NetR28_1: R28.1 R29.2 U4.21 | length 236.1
  Top Layer w10: R29.2 R28.1@1966.54,2155 ; 1966.54,2125.69 2070.69,2125.69 2086.89,2141.89 U4.21 U4.21@2129.71,2139.31
NetRP1_1: RP1.1 RP1.2 S1.B | length 176.2
  Top Layer w10: S1.B 2808.03,423.82 RP1.1 RP1.2
NetRP1_3: RP1.3 RP1.4 S1.A | length 159.6
  Top Layer w10: S1.A 2820.87,298.15 RP1.4 RP1.3
NetU1_5: U1.5 Y1.1 | length 183.7
  Top Layer w10: Y1.1 809.76,2191.57 879.14,2191.57 U1.5
NetU1_6: U1.6 Y1.3 | length 174.2
  Top Layer w10: Y1.3 891.57,2139.76 891.57,2176.57 931.87,2216.87 U1.6
RE1_A: P4.2 R19.1 U1.14 | length 1185
  Top Layer w10: P4.2 R19.1 ; v1(1026.57,1871.57) 1001.57,1896.57 1001.57,2063.46 U1.14
  Bottom Layer w10: P4.2 391.57,1996.57 516.57,1871.57 v1(1026.57,1871.57)
RE1_B: P4.3 R20.1 U1.15 | length 1222
  Top Layer w10: P4.3 R20.1 ; U1.15 1057.55,2087.66 1033.68,2063.8 1033.68,1915.38 1066.57,1882.49 v1(1066.57,1831.57)
  Bottom Layer w10: P4.3 396.57,1896.57 461.57,1831.57 v1(1066.57,1831.57)
RE2_A: C15.2 RP1.5 U1.22 | length 3025.2
  Top Layer w10: U1.22 1791.57,1596.98 v1(1791.57,1571.57) ; RP1.5 2911.1,260.51 C15.2 v1(2915.04,215.04)
  Bottom Layer w10: v1@1786.57,1566.57 1786.57,1386.57 2101.57,1071.57 2101.57,941.57 2216.57,826.57 2471.57,826.57 2915.04,383.11 2965.04,383.11 3006.57,341.57 3006.57,251.57 2970.04,215.04 v1(2915.04,215.04)
RE2_B: C16.2 RP1.8 U1.23 | length 2615
  Top Layer w10: U1.23 1824.82,1591.57 v1(1851.57,1591.57) ; RP1.8 2911.1,492.64 C16.2 v1(2915.04,538.11)
  Bottom Layer w10: v1@1846.57,1586.57 1846.57,1411.57 2201.57,1056.57 2201.57,951.57 2303.15,850 2478.15,850 2790.04,538.11 v1(2915.04,538.11)
RE2_KEY: S1.E U1.21 | length 2031.5
  Top Layer w10: U1.21 1719.07,1641.64 v1@1719.07,1594.07
  Bottom Layer w10: v1(1726.57,1601.57) 1751.57,1576.57 1751.57,1281.57 2001.57,1031.57 2001.57,951.57 2165.98,787.17 S1.E
RST: C1.2 U1.7 | length 216.2
  Top Layer w10: C1.2 908.57,2063.57 908.57,2165.33 U1.7
RXD1: P2.2 U1.43 | length 1142.5
  Top Layer w10: U1.43 1301.98,2586.57 1341.57,2586.57 1436.57,2681.57 1436.57,2991.57 P2.2
SWDCLK: P1.3 U1.49 | length 1003.5
  Top Layer w10: U1.49 1046.57,2620.37 1046.57,2736.57 1051.57,2741.57 v1(1241.57,2741.57)
  Bottom Layer w10: v1(1241.57,2741.57) P1.3
SWDIO: P1.2 U1.46 | length 887.8
  Top Layer w10: U1.46 1246.57,2614.69 v1(1246.57,2641.57)
  Bottom Layer w10: v1(1246.57,2641.57) 1341.57,2736.57 P1.2
TXD1: P2.3 U1.42 | length 1112.1
  Top Layer w10: U1.42 1313.82,2570.57 1348.2,2570.57 1452.57,2674.95 1452.57,2957.57 1731.57,3236.57 v1(1741.57,3236.57)
  Bottom Layer w10: v1(1741.57,3236.57) P2.3
USB_N: J1.2 R2.1 | length 1332.6
  Top Layer w10: J1.2 553.07,3206.83 591.57,3168.32 591.57,3076.57 781.57,2886.57 1246.57,2886.57 1385.47,2747.68 1385.47,2680.47 R2.1
USB_P: J1.3 R3.1 R9.1 | length 1332.3
  Top Layer w10: J1.3 521.58,3223.11 R9.1 571.57,3160.04 571.57,3026.57 601.57,2996.57 636.57,2996.57 656.57,2976.57 656.57,2946.57 686.57,2916.57 723.29,2916.57 773.29,2866.57 1231.57,2866.57 1345.24,2752.91 R3.1
V5: D2.2 F1.1 P4.1 R4.2 U3.3 | length 7030.7
  Top Layer w10: v1@2324.17,1524.17 F1.1 ; v1(2961.57,971.57) 3056.57,876.57 3296.57,876.57 3475.04,698.11 R4.2
  Top Layer w20: v2(735,1400) v2(780,1400) 1257.76,1400 1586.18,1071.57 2051.57,1071.57 2192.13,1212.13 U3.3 2199.25,1576.57 F1.1 ; v1(944.25,3123.9) v1(944.25,3164.25) D2.2
  Bottom Layer w10: v1(2321.57,1521.57) 2321.57,1331.57 2681.57,971.57 v1@2956.57,971.57
  Bottom Layer w20: v2(735,1400) 295,1400 161.57,1533.43 161.57,2016.57 P4.1 241.57,2791.57 506.57,3056.57 876.93,3056.57 v1(944.25,3123.9)
V24: C7.1 C8.1 D1.2 R15.2 U2.5 U4.2 U4.28 U4.29 U4.38 U4.39 | length 4660.7
  Top Layer w20: U4.2 2203.11,2628.11 2265,2690 v2(2555,2690) ; 2417.72,2255 2488.5,2255 v2(2499.25,2244.25) v2(2499.25,2195.75) ; 2417.72,2515 2495,2515 v2(2500,2520) v2(2500,2575) ; C7.1 2826.57,1231.57 ; U2.5 2781.57,1436.57 2766.57,1421.57 2766.57,1341.57 2826.57,1281.57 2826.57,1231.57 ; R15.2 3008.11,1268.11 2969,1229 2829.15,1229 2826.57,1231.57
  Top Layer w40: C7.1 2901.57,1016.57 D1.2
  Bottom Layer w40: v2(2499.25,2195.75) v2@2499.25,2574.25 ; v2(2500,2575) 2500,2630 2555,2685 2950,2685 2970,2685 3140,2515 3140,1240 3061.57,1161.57 C7.1
VCC: C10.2 C11.2 C12.2 C13.2 C14.2 C32.1 LCD1.2 LCD1.17 LCD1.19 P1.1 P2.1 Q1.2 R5.1 R8.2 R13.2 R19.2 R20.2 R28.2 RP1.6 RP1.7 U1.1 U1.13 U1.19 U1.32 U1.48 U1.64 U3.2 U3.4 U4.20 | length 13613.1
  Top Layer w10: R20.2 395.04,2185.04 515.04,2305.04 ; Q1.2 551.57,3093.19 551.57,2913.11 R8.2 515.04,2305.04 ; U1.1 842.78,2266.57 798.11,2266.57 C11.2 ; U1.64 779.1,2303.11 C11.2 ; U1.13 1060.85,2150.57 1120.57,2150.57 1121.57,2151.57 ; 1122.52,2182.52 U1.19 ; C14.2 v1@1515.04,2370.04 ; v1(1821.57,1873.98) 1925,1977.4 1925,2182.37 1942.63,2200 1993.46,2200 R28.2 2040.95,2167.48 U4.20 ; 1925,2035 C13.2@1968,2035 ; RP1.7 RP1.6 2927.32,360.83 2961.57,326.57 v1(2961.57,311.57) ; v1(3111.57,915.57) 3112.57,916.57 3286.57,916.57 3511.57,691.57 3511.57,261.57 R5.1@3477.57,227.57 ; 515.04,2305.04 759.65,2305.04 C11.2
  Top Layer w20: C11.2 838.11,2303.11 870,2335 998.15,2335 1121.57,2211.57 ; C10.2 1088.11,2655.04 1121.57,2621.57 1121.57,2548.51 ; U1.48@1170.11,2597.05 1121.57,2548.51 ; v1(1300,1835) 1300,1840 1301.57,1841.57 1226.57,1841.57 v1(1156.57,1911.57) 1155.04,1913.11 1155.04,2013.11 1121.57,2046.57 1121.57,2151.57 1121.57,2201.57 ; C14.2 1461.57,2367.56 1382.05,2288.04 1343.51,2326.57 1246.57,2326.57 1121.57,2201.57 ; v1(1821.57,1873.98) v1(1848.98,1846.57) C32.1 ; R13.2 1931.57,886.57 2122.76,886.57 LCD1.2 LCD1.2@2268.11,1031.93 ; C32.1@1877.64,1810.04 C32.1 ; v1(2101.57,1501.57) v1(2101.57,1546.57) U3.2 U3.4 1917.05,1849.45 C32.1 ; 1121.57,2201.57 1121.57,2211.57 ; 1121.57,2211.57 1121.57,2548.51
  Bottom Layer w10: v1(1516.57,2371.57) 1516.57,2746.57 1441.57,2821.57 P1.1 1441.57,3451.57 1476.57,3486.57 1891.57,3486.57 1941.57,3436.57 P2.1 ; R13.2 1841.57,471.57 2061.57,251.57 2901.57,251.57 v1(2961.57,311.57) ; LCD1.2 2353.76,915.57 2796.57,915.57 ; 2777.57,915.57 2796.57,915.57 ; v1(3111.57,915.57) 2796.57,915.57
  Bottom Layer w20: LCD1.19 606.18,1070 699.33,1070 LCD1.17 910,1173.82 910,1610 1156.57,1856.57 v1(1156.57,1911.57) ; v1(1300,1835) 1300,1840 v1(1326.57,1866.57) 1476.57,2016.57 1678.98,2016.57 v1(1821.57,1873.98) ; v1(2101.57,1501.57) 2101.57,1276.57 2252.76,1125.39 LCD1.2
  other v1: 1200,1955
VUSB: D2.1 J1.1 R11.2 | length 430.2
  Top Layer w10: R11.2 768.11,3225.79 D2.1
  Top Layer w20: J1.1 584.57,3283.58 631.57,3236.57 D2.1
X-LIMIT: U1.35
Y-LIMIT: U1.36
pads on no net: D1.0 D2.0 D4.0 J1.4 J1.6 J1.7 J1.8 J1.9 J1.MH1 J1.MH2 LCD1.16 LCD1.18 P29.3 P30.3 S1.0 S2.0 U1.39 U1.40 U1.51 U1.52 U1.53 U1.54 U1.55 U1.56 U1.57 U1.58 U1.59 U2.0 U4.26 U4.27 U4.40 U4.41

## Polygon pours and split planes (outlines as drawn)
GND on Top Layer "Bottom Layer-No Net" (solid, remove dead copper, pour order 1000): -128.43,3704.57 3596.57,3704.57 3596.57,-108.43 -128.43,-108.43
GND on Bottom Layer "Bottom Layer-No Net" (solid, remove dead copper, pour order 1001): -128.43,3704.57 -128.43,-108.43 3596.57,-108.43 3596.57,3704.57

## Keep-outs
Keep-Out Layer:
  lines w10: -128.43,-115 -128.43,3704.57 3596.57,3704.57 3596.57,-115 -128.43,-115

## Other copper
Top Layer:
  pour cut-out: -90.79,345 670,345 670,135 -90.79,135
  text "Stepper Motor Tester V1.1" at -68.43,291.57 h30
  text "Designed By ZYX" at -68.43,221.57 h30
  text "2014.9" at -68.43,166.57 h30
Bottom Layer:
  region: 5 vertices and 23 holes, not listed, extent 2523,2842 3323,3642
  region: 2603,3450 2723,3450 2723,3570 2603,3570 hole: 2627,3546 2699,3546 2699,3538 2699,3530 2699,3522 2699,3514 2699,3506 2699,3498 2699,3490 2699,3482 2699,3474 2627,3474 2627,3482 2627,3490 2627,3498 2627,3506 2627,3514 2627,3522 2627,3530 2627,3538
  region: 3131,3450 3251,3450 3251,3570 3131,3570 hole: 3155,3546 3227,3546 3227,3538 3227,3530 3227,3522 3227,3514 3227,3506 3227,3498 3227,3490 3227,3482 3227,3474 3155,3474 3155,3482 3155,3490 3155,3498 3155,3506 3155,3514 3155,3522 3155,3530 3155,3538
  region: 3131,2922 3251,2922 3251,3042 3131,3042 hole: 3155,3018 3227,3018 3227,3010 3227,3002 3227,2994 3227,2986 3227,2978 3227,2970 3227,2962 3227,2954 3227,2946 3155,2946 3155,2954 3155,2962 3155,2970 3155,2978 3155,2986 3155,2994 3155,3002 3155,3010
  region: 2699,3018 2771,3018 2771,3090 2699,3090 hole: 2723,3066 2747,3066 2747,3058 2747,3050 2747,3042 2723,3042 2723,3050 2723,3058
  region: 3155,3330 3107,3330 3107,3306 3179,3306 3179,3330 3203,3330 3203,3354 3227,3354 3227,3378 3155,3378
  region: 2939,3306 2891,3306 2891,3258 2939,3258 2939,3306 2963,3306 2963,3282 2987,3282 2987,3330 2939,3330
  region: 2843,3306 2891,3306 2891,3330 2843,3330
  region: 3203,3306 3227,3306 3227,3330 3203,3330
  region: 2891,3354 2915,3354 2915,3378 2891,3378
  region: 3227,3282 3251,3282 3251,3306 3227,3306
  region: 3179,3162 3203,3162 3203,3186 3179,3186
  region: 3179,3114 3203,3114 3203,3138 3179,3138
  region: 2891,3066 2915,3066 2915,3090 2891,3090
  region: 3035,3258 3059,3258 3059,3282 3035,3282
  region: 3155,3186 3179,3186 3179,3210 3155,3210
  region: 3107,3162 3131,3162 3131,3186 3107,3186

## Silkscreen, mask and mechanical layers (free items; w line width, h text height)
Top Overlay:
  text "SWD" at 1201.57,3571.57 h30
  text "UART" at 1721.57,3566.57 h30
  text "Motor" at 3221.57,1666.57 h30
  text "Encoder" at 1.57,1656.57 h30
  text "5V" at 3175,340 h30
  text "3.3V" at 3125,220 h30
Bottom Overlay:
  text "GND" at 1620,3315 h30 r270
  text "Tx" at 1720,3315 h30 r270
  text "Rx" at 1825,3315 h30 r270
  text "GND" at 1110,3305 h30 r270
  text "CLK" at 1220,3305 h30 r270
  text "DIO" at 1315,3305 h30 r270
  text "+" at 1915,3290 h30
  text "+" at 1410,3280 h30
Top Solder:
  region: -85,335 660,335 660,260 545,145 -85,145
Bottom Solder:
  rectangle: 1940,1935 2465,2810

## Text inside footprints (layer, text, board x,y; h text height)
J1: Mechanical 1 "PCB Edge" at 680.49,3721.59 h30 r180